# Altium PCB CAN Logger 3a HP3561 PCB.PcbDoc (part 2 of 2)
Units mil, origin at the board's own origin, x right, y up, seen from the top; angles counter-clockwise.
Board outline 2229 x 3254 mil, 4 copper layers (Component Side, Signal Layer 2, Signal Layer 1, Solder Side), stack 33.234 mil thick; 82 components, 94 nets, 403 pads, 304 vias.
Unrouted connection lines stored in the file: 3.
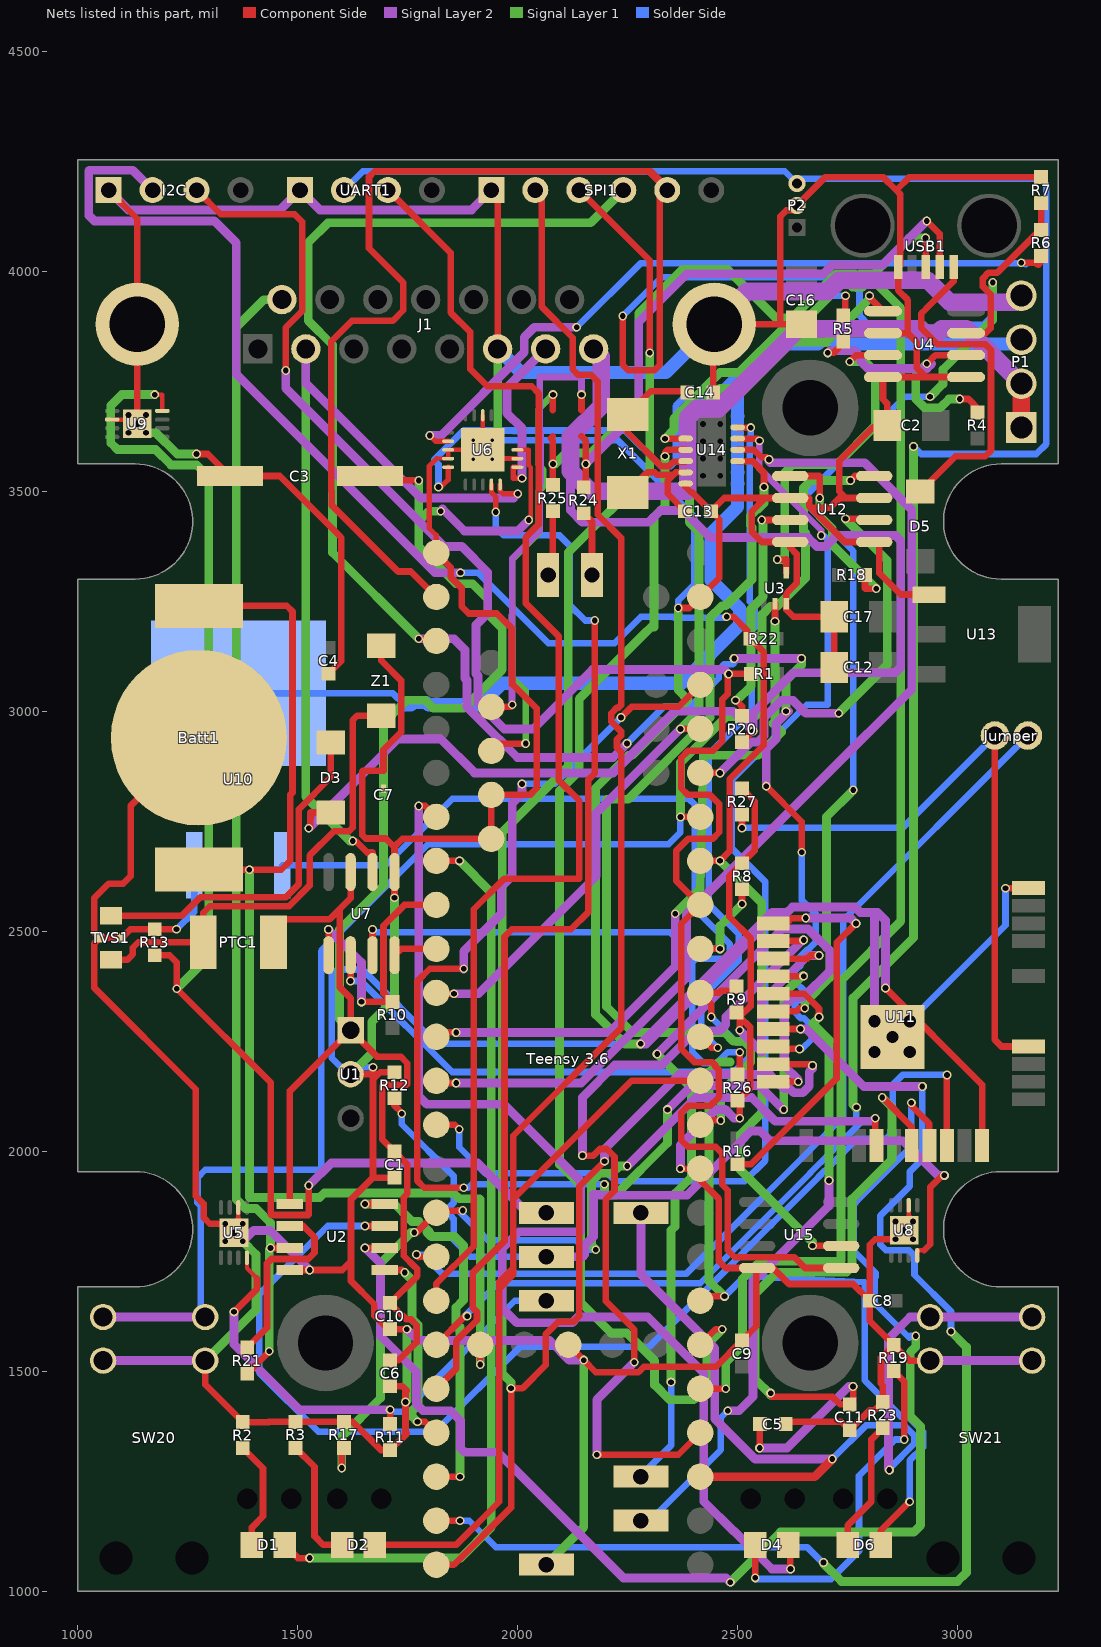
[diagram p4: the nets of this part, all layers, seen from the top]

## Via types
v1: diameter 20, hole 13, Component Side to Solder Side, 296 vias
v2: diameter 19.68, hole 7.87, Component Side to Solder Side, 4 vias
v3: diameter 50, hole 28, Component Side to Solder Side, 4 vias

## Nets (pads, with @x,y where several pads share a name; then routed paths per layer and width w, separated by ;. In a path a pad name is that pad's centre, name@x,y a point inside that pad or via, vN(x,y) a via of type N, cw(c..) or ccw(c..) an arc to the next point about the centre after c; other vN are vias at no path point) (continued)
GND: "Teensy 3.6.14" "Teensy 3.6.17" "Teensy 3.6.32" "Teensy 3.6.59" "Teensy 3.6.78" "Teensy 3.6.79" "Teensy 3.6.90" Batt1.2 C1.1 C2.1 C3.2 C4.2 C5.1 C6.1 C7.2 C8.1 C9.1 C10.2 C11.1 C12.1 C13.1 C14.1 C16.1 C17.1 I2C.1 J1.6 J1.16 J1.17 P1.4 P2.2 R2.2 R3.2 R7.2 R8.2 R9.2 R11.2 R12.2 R13.2 R17.2 R19.2 R23.2 R26.2 R27.1 SPI1.1 SW20.2 SW20.4 SW21.2 SW21.4 TVS1.3 U1.2 U2.8 U3.3 U4.2 U4.4 U4.5 U5.0 U5.2 U6.3 U6.4 U6.12 U6.18 U6.21 U7.5 U8.0 U8.2 U9.0 U9.2 U10.3 U11.9 U11.12 U11.28 U11.29 U12.2 U12.4 U12.5 U12.7 U13.1 U14.7 U15.4 UART1.1 USB1.4 Z1.1 | length 27041.5
  Component Side w10: U9.2@1077.91,3663.31 1115,3663.31 U9.0@1121.89,3663.31 ; U5.0@1364.84,1845.16 U5.2@1364.84,1872.09 ; 1816,3574.72 U6.4@1841.89,3574.72 U6.3@1841.89,3594.41 U6.21@1920.63,3594.41 U6.18@1920.63,3673.15 ; U8.0@2888.73,1850.16 U8.2@2888.73,1877.09
  Component Side w11.81: 1815,3360 1815,3400.44 1799.09,3416.34 1799.09,3557.82 1816,3574.72 ; U6.21@1944.25,3574.72 U6.12@1999.37,3574.72
  Component Side w14.76: U5.0@1364.84,1845.16 v1(1375,1835) ; U8.0@2888.73,1850.16 v1(2898.89,1840)
  Component Side w15: I2C.1@1070,4185 1135,4120 J1.16@1135,3880 U9.0@1135,3653.47 1144.53,3663 1155,3663 v1(1155,3673.47) ; v1(1115,3633.47) 1115,3663.31 v1(1115,3673.47) ; v1(1224.53,2504.53) R13.2@1175,2504.53 1119.53,2504.53 TVS1.3@1100,2485 TVS1.3@1050,2485 ; v1(1270,3585) 1295.55,3585 C3.2@1345.55,3535 1459,3535 1599,3395 1599,3114.47 C4.2@1570,3085.47 ; Batt1.2@1275,2940 1120,2785 1120,2625 1103,2608 1070,2608 1037,2575 1037,2498 TVS1.3@1050,2485 ; SW20.4@1289.5,1524 1289.5,1469.55 R2.2@1375,1384.05 1434,1384.05 1434.47,1384.53 R3.2@1495,1384.53 R17.2@1605,1384.53 1624.92,1384.53 1688.98,1320.47 R11.2@1710,1320.47 1748,1358.47 1745,1361.47 v1(1745,1430) 1745,1452.41 1748,1455.41 1737.94,1465.47 C6.1@1710,1465.47 ; v1(1335,1795) v1(1335,1835) 1300,1835 1286,1849 1286,1880 1268,1898 1268,2141 1037,2372 1037,2472 TVS1.3@1050,2485 ; U5.0@1355,1815 1365,1825 U5.0@1375,1825 ; v1(1375,1795) U5.0@1375,1825 ; v1(1375,1835) U5.0@1375,1825 ; U2.8@1482.13,1730 v1(1527,1730) 1601,1730 1621,1750 ; U1.2@1620,2175 1671,2175 ; v1(1671,2191) 1671,2175 ; Z1.1@1690,3149 1690,3115 1735,3070 1735,2952.5 1695,2912.5 1695,2865.12 1648,2865.12 1647,2864.12 1647,2718.28 1654.39,2710.89 1700,2710.89 1720,2690.88 ; C10.2@1710,1595.47 1747.53,1595.47 v1(1748,1595) 1705,1595 1674,1626 1674,1652 1621,1705 1621,1750 ; C1.1@1720,1940 1671.75,1940 ; R12.2@1720,2179.53 1687.5,2179.53 1682.97,2175 ; v1(1720,2576) U7.5@1720,2634.49 1720,2690.88 ; 1815,3360 1847.5,3327.5 1847.5,3305.68 1872.56,3280.62 1872.56,3238.7 1888.76,3222.5 1952.5,3222.5 1987,3188 1987,3061.25 1988.75,3061.25 2043,3007 2043,2825 2028,2810 1940,2810 1940,2710 1737.5,2710 1720,2692.5 1720,2690.88 ; U6.21@1920.63,3594.41 1931.22,3605 1942.28,3605 v2(1942.28,3616.06) ; SPI1.1@1940,4185 1954.49,4170.51 J1.6@1954.49,3824.09 ; v2(1942.28,3572.76) U6.21@1944.25,3574.72 ; 2115,1560 v1(2150,1525) 2177.5,1497.5 2274.32,1497.5 2286.82,1510 2450.47,1510 C9.1@2510,1569.53 2542.5,1602.03 2542.5,1732.5 U15.4@2544.53,1734.53 ; v1(2365,3235) 2390,3235 2415,3260 2458,3303 2458,3436.53 C13.1@2439.53,3455 ; v1(2369.84,1960) 2415,1960 2415,1933.5 2457.5,1891 2457.5,1750 2472.97,1734.53 U15.4@2544.53,1734.53 ; U14.7@2381.89,3517.64 2381,3517.64 2381,3510.5 2393.5,3498 2396.53,3498 C13.1@2439.53,3455 ; C14.1@2444.53,3725 2444.53,3801 2446.81,3803.29 J1.17@2446.81,3880 2545,3880 2545.12,3879.88 2598,3879.88 ; v1(2505,2075) 2505,2110 R26.2@2500,2115 2529,2144 2529,2281.47 R9.2@2505,2305.47 ; v1(2505,2275) R9.2@2505,2305.47 ; R27.1@2510,2824.53 2539,2795.53 2539,2683.53 R8.2@2510,2654.53 2481,2625.53 2481,2533 2529.47,2484.53 2529.47,2329.94 R9.2@2505,2305.47 ; U11.12@2581.04,2437.79 2657.79,2437.79 2665,2445 v1(2685,2445) ; C5.1@2609.53,1385 2735.47,1385 C11.1@2755,1365.47 2801,1411.47 2811.95,1411.47 R23.2@2830,1429.53 2830,1468 2826,1472 2826,1530.53 R19.2@2855,1559.53 ; C16.1@2645,3879.88 2598,3879.88 ; C12.1@2719.88,3100 C17.1@2719.88,3215 2627.09,3215 2610.59,3231.5 U3.3@2610.59,3244.57 2610.59,3268 2634,3291.41 2634,3357.82 2619.53,3372.29 U12.4@2619.53,3385 2555,3385 2532.5,3407.5 2532.5,3455 2562.5,3485 ; U12.7@2810.47,3485 2746,3485 ; U4.2@2830.51,3860 2886,3860 ; v1(2836,2370.84) 3055.84,2151 U11.28@3055.84,2012.91 ; v1(2858.89,1800) 2812.97,1800 2800.47,1787.5 C8.1@2800.47,1660 ; v1(2898.89,1800) v1(2898.89,1840) ; U13.1@2934.84,3265.55 2871,3265.55 2822,3314.55 2822,3385 U12.5@2810.47,3385 2744,3385 2666.5,3462.5 ; SW21.2@2937.5,1524 2890.53,1524 R19.2@2855,1559.53 ; U4.5@3019.49,3760 2928.18,3760 ; v1(3109,2598) U11.9@3160.96,2598.03 ; R7.2@3190,4214.53 2890.53,4214.53 2860.5,4184.5 ; 1621,1750 1621,1890 1671,1940 ; 1671,1940 1671.75,1940 ; 1671,1940 1671,2175 ; 1671,2175 1682.97,2175 ; 1671.75,1940 1671.75,2163.78 1682.97,2175 ; C13.1@2439.53,3455 2469.53,3485 2562.5,3485 ; U15.4@2544.53,1734.53 2580.47,1734.53 2617,1698 2762.47,1698 C8.1@2800.47,1660 ; 2562.5,3485 U12.2@2619.53,3485 2662,3485 2663,3484 2663,3466 2666.5,3462.5 ; 2598,3879.88 2597,3880.88 2597,4125 2611,4139 2635,4139 P2.2@2635,4150 2699.53,4214.53 2830.47,4214.53 2860.5,4184.5 ; 2666.5,3462.5 2709,3462.5 2731.5,3485 2746,3485 ; 2746,3485 2731,3500 2731,3569 2808,3646 2839.88,3646 C2.1@2839.88,3650 2839.88,3700 2830.51,3709.37 U4.4@2830.51,3760 2928.18,3760 ; C8.1@2800.47,1660 2800.47,1614.05 R19.2@2855,1559.53 ; 2860.5,4184.5 2870,4175 2870,4015 USB1.4@2865,4010 2865,3957 2887,3935 2887,3861 2886,3860 ; 2886,3860 2907.5,3838.5 2907.5,3780.68 2928.18,3760
  Signal Layer 2 w20: SW20.2@1057.5,1524 SW20.4@1289.5,1524 ; I2C.1@1070,4185 1115,4140 1460,4140 UART1.1@1505,4185 1550,4140 1895,4140 SPI1.1@1940,4185 ; v1(1375,1795) 1400,1820 1437,1820 v1(1527,1730) ; v1(1748,1595) 1773.47,1569.53 2072.47,1569.53 2117,1525 v1(2150,1525) ; v2(1898.98,3572.76) v2(1942.28,3572.76) ; v2(1898.98,3616.06) v2(1942.28,3616.06) ; v1(2369.84,1960) 2369.84,2013.67 2451.17,2095 2471.88,2095 2491.88,2075 v1(2505,2075) ; v1(2505,2275) 2554.29,2225.71 2554.29,2339.29 2660,2445 v1(2685,2445) ; 2589,2543 2578.5,2543 v1(2279.5,2244) 2292,2244 2591,2543 2612.64,2543 2624.64,2555 2767.15,2555 2779.15,2543 2811,2543 ; v3(2811,2225.47) 2817.61,2225.47 U11.29@2851.91,2259.76 ; v3(2811,2295.47) 2811,2543 ; v1(2836,2370.84) 2836,2525 2818,2543 2811,2543 ; v1(2858.89,1800) v1(2898.89,1800) ; U8.0@2878.89,1820 2868.89,1830 2858.89,1830 v1(2858.89,1840) v1(2898.89,1840) ; SW21.2@2937.5,1524 SW21.4@3169.5,1524
  Signal Layer 2 w40: J1.17@2446.81,3880 2521.3,3954.49 2704.99,3954.49 2730.5,3980 2932,3980 2982,3930 3130,3930 P1.4@3145,3945
  Signal Layer 1 w20: v1(1155,3673.47) v1(1155,3633.47) 1177.53,3633.47 1226,3585 v1(1270,3585) ; SW20.4@1289.5,1524 1405,1639.5 1405,1765 v1(1375,1795) ; U1.2@1620,2175 1668,2223 1668,2294 1720,2346 v1(1720,2576) ; v1(1745,1430) 1748,1433 v1(1748,1595) ; v2(1942.28,3572.76) v2(1942.28,3616.06) 1954.49,3628.27 J1.6@1954.49,3824.09 ; 2065,1060 2150,1145 v1(2150,1525) ; v1(2279.5,2244) 2244,2244 2177,2311 2177,2825 2252,2900 2260.36,2900 2387,3026.64 2365,3048.64 v1(2365,3235) ; v3(2811,2225.47) v3(2811,2295.47) ; v3(2891,2225.47) v3(2891,2295.47)
  Solder Side w15: v1(1115,3633.47) v1(1155,3633.47) ; v1(1224.53,2504.53) 1265,2545 U10.3@1265,2649.84 ; v1(1335,1795) v1(1375,1795) ; v1(1671,2191) 1598.5,2191 1577,2212.5 1577,2400 1590,2413 1647,2413 1816,2244 v1(2279.5,2244) ; v2(1898.98,3616.06) v2(1942.28,3616.06) 2227.94,3616.06 2401,3443 2401,3288 2365,3252 v1(2365,3235) ; v3(2811,2225.47) v3(2891,2225.47) ; v3(2891,2295.47) 3109,2513.47 v1(3109,2598)
  Solder Side w30: J1.6@1954.49,3824.09 2008.58,3770 2336.81,3770 J1.17@2446.81,3880
"GPS RX": "Teensy 3.6.41" P2.3 UART1.2 | length 5341.1
  Component Side w15: 1815,1560 1880,1625 v1(1885,1625)
  Signal Layer 1 w20: v1(2770,2100) 2770,2097.84 2762.16,2105.67 2762.16,2348 2900,2485.84 v1(2900,3602)
  Solder Side w15: UART1.2@1605,4185 1648,4228 2607,4228 P2.3@2635,4200 2635,4211 3187.5,4211 3202,4196.5 3202,3608 3179,3585 2917,3585 v1(2900,3602) ; v1(1885,1625) 1880,1625 1955,1700 2415,1700 2665,1950 2665,1951.1 2689.9,1976 2691,1976 2780,2065 2770,2075 v1(2770,2100)
"GPS TX": "Teensy 3.6.40" UART1.3 | length 3023
  Component Side w15: UART1.3@1705,4185 1847.5,4042.5 1847.5,3907 1892,3862.5 1892,3778 1931,3739 2032,3739 2047.5,3723.5 2047.5,3424.5 2018,3395 2018,3246 2093,3171 2093,2844 2140,2797 2140,2620 2139,2619 1969,2619 1899.97,2549.97 1899.97,1783.97 1815,1699 1815,1660
"J1708 RX": "Teensy 3.6.4" "Teensy 3.6.29" U4.1 | length 2243.6
  Component Side w15: 1815,2360 1817.21,2357.79 v1(1855,2357.79) ; v1(2370,2960) 2415,2960 ; v1(2800,3945) 2800,3940.51 U4.1@2830.51,3910
  Signal Layer 2 w20: v1(1855,2357.79) 1910.79,2357.79 2178,2625 2178,2768 v1(2370,2960)
  Signal Layer 1 w20: v1(2370,2960) 2412,3002 2412,3408.25 2390.25,3430 2390.25,3665.25 2459.65,3734.65 2506.3,3734.65 2611.65,3840 2702,3840 2800.51,3938.51 2800,3939.02 v1(2800,3945)
"J1708 TX": "Teensy 3.6.3" U3.2 | length 1614.3
  Component Side w15: 1815,2260 1825,2270 v1(1860,2270) ; v1(2585,3205) U3.2@2585,3244.57
  Signal Layer 2 w20: v1(1860,2270) 2208,2270 2358,2420 v1(2358,2540)
  Signal Layer 1 w20: v1(2358,2540) 2415,2597 2422,2900 2547,2900 2600,2953 2580.64,2972.36 2585,2976.72 v1(2585,3205)
J1708+: R5.2 U6.5 | length 1400.7
  Component Side w11.81: v1(1820,3510) 1825.47,3510 1825.97,3510.5 1841.89,3526.42 U6.5@1841.89,3555.04
  Component Side w15: R5.2@2740,3899.53 2745,3904.53 v1(2745,3945)
  Solder Side w15: v1(1820,3510) 1820,3561.41 1810,3571.41 1877,3638.41 2244.09,3638.41 2325,3557.5 2348,3557.5 2359,3568.5 2359,3694 2375,3710 2440,3710 2675,3945 v1(2745,3945)
J1708-: R6.2 U6.2 | length 1669
  Component Side w11.81: v1@1800,3624.91 v1(1800,3626.94) 1812.84,3614.09 U6.2@1841.89,3614.09
  Component Side w15: v1(3145,4020) 3178,4020 3183,4015 3190,4022 R6.2@3190,4035.47
  Signal Layer 2 w20: v1(1800,3626.94) 1825.59,3626.94 2015,3816.34 2015,3850.5 2037.5,3873 v1(2134,3873)
  Solder Side w15: v1(2134,3873) 2280,4019 v1@3152,4019 ; v1(3145,4020) 3151,4020 v1@3152,4019 ; v1@3152,4019 3158,4019 3155,4016 v1@3152,4019
LIN: J1.2 U6.10 U7.6 | length 1995.8
  Component Side w11.81: U6.10@1960,3515.67 1960,3501.5 1967.03,3494.47 v1(2000,3494.47)
  Component Side w15: v1(1625,2705) 1631.99,2705 1657.99,2679 1670,2679 U7.6@1670,2634.49
  Signal Layer 2 w20: J1.2@1518.27,3824.09 1518.27,3746.38 1779.64,3485 1990.53,3485 v1(2000,3494.47)
  Signal Layer 1 w20: J1.2@1518.27,3824.09 1518.27,2805.73 1619,2705 v1(1625,2705)
"LIN1 RX": "Teensy 3.6.6" R10.1 U7.1 | length 645
  Component Side w15: U7.1@1570,2445.51 v1(1570,2504) ; v1(1645,2339.53) R10.1@1715,2339.53 1695,2359.53 1695,2512.5 1742.5,2560 1815,2560
  Signal Layer 2 w20: v1(1570,2504) 1645,2429 v1(1645,2339.53)
"LIN1 TX": "Teensy 3.6.5" U7.4 | length 101
  Component Side w15: U7.4@1720,2445.51 1734.49,2460 1815,2460
"LIN !WAKE": "Teensy 3.6.24" R8.1 U7.3 | length 1112.9
  Component Side w15: U7.3@1670,2445.51 v1(1670,2504) ; v1(2510,2562) R8.1@2510,2595.47 ; 2415,2460 v1(2460,2460) 2415,2460
  Signal Layer 1 w20: v1(2460,2460) 2460,2512 v1(2510,2562)
  Solder Side w15: v1(1670,2504) 1676.5,2497.5 2347.68,2497.5 2385.18,2460 v1(2460,2460)
"LIN CS": "Teensy 3.6.23" R9.1 U7.2 | length 1359.2
  Component Side w15: v1(1620,2387) U7.2@1620,2445.51 ; v1(2440,2305) 2440,2335 2415,2360 2457,2360 2461.53,2364.53 R9.1@2505,2364.53
  Solder Side w15: v1(1620,2387) 1644,2387 1851,2180 2491.82,2180 2527.5,2215.68 2527.5,2234.32 2514.32,2247.5 2497.5,2247.5 v1(2440,2305)
"LIN Switch": "Teensy 3.6.42" U6.9 | length 2475.9
  Component Side w11.81: U6.9@1940.32,3515.67 1940.32,3497.41 1950,3487.73 v1(1950,3453)
  Component Side w15: 1815,1460 1860,1505 1860,1568.18 1907.5,1615.68 1907.5,1634.32 1897.5,1644.32 1897.5,1723 1970,1795.5 1970,2487.5 1987,2504.5 2121.5,2504.5 2160,2543 2160,2844 2175,2859 v1(2175,3206.53)
  Solder Side w15: v1(1950,3453) 1950,3418.28 1968.28,3400 2095,3400 2118.07,3376.93 2118.07,3241.92 2153.47,3206.53 v1(2175,3206.53)
NetBatt1_1: "Teensy 3.6.15" Batt1.1 | length 2703.2
  Component Side w15: Batt1.1@1275,2640 v1(1390,2640) 1462.5,2640 1482.5,2660 1482.5,2809.85 1488,2815.35 1488,3227 1475,3240 Batt1.1@1275,3240 ; v1(1915,1515) 1915,1560
  Signal Layer 1 w20: v1(1390,2640) 1390,1896 1391,1895 1550,1895 1560,1905 1854.12,1905 1867.12,1892 1913,1892 1915,1890 v1(1915,1515)
NetC5_2: C5.2 C11.2 U11.24 | length 1628.6
  Component Side w15: C5.2@2549.88,1385 2550,1384.88 v1(2550,1325.47) ; v1(2575,1450) 2575,1445 2578.5,1441.5 2716.03,1441.5 2733,1424.53 C11.2@2755,1424.53 2762.47,1432 v1(2762.47,1465) ; v1(2829,2122) 2895.84,2055.16 U11.24@2895.84,2012.91
  Signal Layer 2 w20: v1(2550,1325.47) 2612.97,1325.47 2752.5,1465 v1(2762.47,1465)
  Signal Layer 1 w20: v1(2575,1450) 2575,1446 2540,1481 2540,1675.5 2589.5,1725 2747.5,1725 2760,1737.5 2760,1891 2851,1982 2851,2100 v1(2829,2122)
NetC13_2: C13.2 U14.6 X1.1 | length 267.6
  Component Side w15: X1.1@2250,3497.83 2295.4,3543.23 2311.67,3543.23 2317.4,3537.5 2353.5,3537.5 2359.23,3543.23 ; C13.2@2380.47,3455 2341,3494.47 2341,3525 2359.23,3543.23 ; U14.6@2381.89,3543.23 2359.23,3543.23
NetC14_2: C14.2 U14.5 X1.2 | length 368
  Component Side w15: U14.5@2381.89,3568.82 2380.57,3567.5 2354.32,3567.5 2344.32,3557.5 2325.68,3557.5 2250,3633.18 X1.2@2250,3675 2302.5,3727.5 2382.97,3727.5 C14.2@2385.47,3725
NetD1_1: "Teensy 3.6.7" D1.1 | length 2108.8
  Component Side w15: D1.1@1470.4,1105 1500.4,1075 v1(1527,1075) ; 1815,2660 v1(1867.88,2660)
  Signal Layer 1 w20: v1(1527,1075) 1870,1075 1940,1145 1940,2587.88 v1(1867.88,2660)
NetD1_2: D1.2 R2.1 | length 249.6
  Component Side w15: R2.1@1375,1325 1421,1279 1421,1170 1395.6,1144.6 D1.2@1395.6,1105
NetD2_1: "Teensy 3.6.21" D2.1 SPI1.2 | length 4144
  Component Side w15: D2.1@1675.4,1105 1860,1105 1958,1203 1958,1687 ; SPI1.2@2040,4185 2055,4170 2055,3919.5 2125,3849.5 2125,3777.5 2137.5,3765 2167,3765 2182,3750 2182,3447 2235,3394 2235,3014.28 2229.22,3008.5 2225.68,3008.5 2212.5,2995.32 2212.5,2976.68 2235,2954.18 2235,2945.18 2225.82,2936 2225.82,2917.36 2235,2908.18 2235,2280 1990,2035 1990,1891 ; 2415,2160 2259,2160 1990,1891 ; 1958,1687 1958,1703 1990,1735 ; 1958,1687 1990,1719 1990,1735 ; 1990,1735 1990,1891
NetD2_2: D2.2 R3.1 | length 289.2
  Component Side w15: R3.1@1495,1325.47 1538,1282.47 1538,1125 1558,1105 D2.2@1600.6,1105
NetD3_2: D3.2 TVS1.1 | length 809.1
  Component Side w15: TVS1.1@1075,2535 1236,2535 1278,2577 1472,2577 1502.5,2607.5 1502.5,2777.5 1575,2850 D3.2@1575,2929
NetD4_1: "Teensy 3.6.8" D4.1 | length 2741.8
  Component Side w15: v1(1775,2785) 1790,2785 1815,2760 ; D4.1@2615.4,1105 2620,1100.4 v1(2620,1050)
  Signal Layer 2 w20: v1(1775,2785) 1775,2125 1793.27,2106.73 1968.27,2106.73 2143,1932 2143,1818 2142,1817 2003,1817 1965,1779 1965,1643 1998,1610 2123.71,1610 2136.71,1623 2295.71,1623 2423,1495.71 2423,1203.64 2489.83,1136.82 2491.18,1136.82 2578,1050 v1(2620,1050)
NetD4_2: D4.2 R19.1 | length 812.4
  Component Side w15: v1(2540.12,1030) 2540.12,1104.52 D4.2@2540.6,1105 ; R19.1@2855,1500.47 2878.89,1476.58 v1(2878.89,1344.47)
  Solder Side w15: v1(2540.12,1030) 2542.62,1027.5 2712.5,1027.5 2776,1091 2776,1262 2858.47,1344.47 v1(2878.89,1344.47)
NetD5_1: D5.1 USB1.1 | length 776.3
  Component Side w15: D5.1@2915,3500 2995,3580 3063,3580 3076,3593 3076,3821.5 3062.5,3835 2953.8,3835 2917.5,3871.3 2917.5,3904.32 2927.5,3914.32 2927.5,3914.5 2990.98,3977.98 USB1.1@2990.98,4010
NetD6_1: "Teensy 3.6.51" D6.1 R26.1 U10.1 | length 3536
  Component Side w15: 2415,1660 2425,1670 v1(2470,1670) ; R26.1@2500,2174.05 2505,2179.05 v1(2505,2225) ; D6.1@2825.4,1105 2825.4,1137.5 v1(2891,1203.1)
  Signal Layer 1 w20: v1(2470,1670) 2435,1705 2435,2180 2458.05,2203.05 2483.05,2203.05
  Solder Side w15: U10.1@1465,2649.84 1700,2649.84 ; 1700,2650 1851,2801 2389.5,2801 2403,2787.5 2403,2550 2482.5,2470.5 2482.5,2450.68 2469.32,2437.5 2405.68,2437.5 2397,2428.82 2397,2225.5 2422.5,2200 2452.18,2200 2477.18,2225 v1(2505,2225) ; v1(2470,1670) 2516,1716 2789,1702 2789,1479 2871.5,1396.5 2886.97,1396.5 2921.39,1362.08 2921.39,1326.87 2891,1296.48 v1(2891,1203.1)
NetD6_2: D6.2 R23.1 | length 298.4
  Component Side w15: D6.2@2750.6,1105 2750.6,1150 2804,1203.4 2804,1344.47 R23.1@2830,1370.47
NetI2C_2: "Teensy 3.6.26" I2C.2 R22.2 U15.6 | length 4073
  Component Side w15: 2415,2660 v1(2460,2660) 2481.75,2681.75 2481.75,2845.45 2559,2922.7 2559,3135.47 R22.2@2529.47,3165 2521.49,3172.99 2521.49,3183.99 2490.47,3215 v1(2475,3215) ; v1(2670,1785) 2735,1785 U15.6@2735.47,1784.53
  Signal Layer 2 w20: I2C.2@1170,4185 1125,4230 1026,4230 1025,4229 1025,4127.5 1037.5,4115 1310,4115 1360,4065 1360,3767 1812,3315 v1(1870,3315)
  Signal Layer 1 w20: v1(2460,2660) 2555,2565 2555,2087 2506,2038 2506,1957.53 2670,1793.53 v1(2670,1785)
  Solder Side w15: v1(1870,3315) 1910,3315 2070,3155 2220,3155 2280,3215 2353.18,3215 2355.68,3212.5 2472.5,3212.5 v1(2475,3215)
NetI2C_3: "Teensy 3.6.25" I2C.3 R1.2 U15.5 | length 4357.7
  Component Side w15: I2C.3@1270,4185 1325,4130 1492.5,4130 1510,4112.5 1510,3910 1472.5,3872.5 v1(1472.5,3775) ; R1.2@2530.47,3085 v1(2479.53,3085) 2477.5,3085 2477.5,3039.32 2465,3026.82 2465,2932 2443,2910 2387.5,2910 2372,2894.5 2372,2825 2387,2810 2437.5,2810 2458,2789.5 2458,2725 2443,2710 2387.5,2710 2360,2682.5 2360,2615 2415,2560 2372,2517 2372,2232.5 2402,2202.5 2442.5,2202.5 2448.5,2196.5 2448.5,2193.68 2457.5,2184.68 2457.5,2147 2458,2146.5 2458,2123.5 2437.5,2103 2387.5,2103 2372,2087.5 2372,2025 2387,2010 2450,2010 2465,1995 2465,1923.74 2477.5,1911.24 2477.5,1775 2493.5,1759 2629,1759 2653.47,1734.53 U15.5@2735.47,1734.53
  Signal Layer 2 w20: v1(1472.5,3775) 1472.5,3734.88 1832.38,3375 1872.5,3375 1931.94,3315.56 1931.94,3222.94 1905,3196 1905,3085.71 1910,3080.71 1910,3019.64 1970,2959.64 2034.64,2959.64 2170,3095 2469.53,3095 v1(2479.53,3085)
NetJumper_1: "Teensy 3.6.39" Jumper.1 | length 2226
  Component Side w15: v1(1770,1765) 1770,1763 1774,1759 1775,1760 1815,1760
  Solder Side w15: v1(1770,1765) 1785,1765 1829,1721 2382.82,1721 2740,2078.18 2740,2525 Jumper.1@3160,2945
NetJumper_2: Jumper.2 R27.2 U11.4 | length 1466.6
  Component Side w15: v1(2510,2735) R27.2@2510,2765.47 ; Jumper.2@3085,2945 3085,2253.03 3100,2238.03 U11.4@3160.96,2238.03
  Solder Side w15: v1(2510,2735) 2875,2735 Jumper.2@3085,2945
NetP1_3: P1.3 U10.2 | length 2513.4
  Solder Side w15: U10.2@1365,3041.57 1715.43,3041.57 1742,3015
  Solder Side w30: 1742,3015 1757.57,3015 1762.57,3020 1792.43,3020 1797.43,3015 1915.78,3015 1964.78,3064 2372.68,3064 2505,3196.32 2505,3233 2440,3298 2440,3405 2500,3465 2500,3594.17 2499.88,3594.29 2499.88,3635.71 2500,3635.83 2500,3724.36 2610.64,3835 2682.57,3835 2692.57,3845 2717.43,3845 2727.43,3835 3135,3835 P1.3@3145,3845
NetPTC1_1: PTC1.1 TVS1.2 Z1.2 | length 1075.9
  Component Side w15: TVS1.2@1075,2435 1112.5,2435 1125,2447.5 1125,2462.5 1137.5,2475 PTC1.1@1285,2475 1285,2542 1300,2557 1480.28,2557 1527,2603.72 1527,2672 1582.5,2727.5 1616.5,2727.5 1625,2736 1625,2980 1635,2990 Z1.2@1690,2990
NetR4_2: R4.2 R5.1 U4.6 | length 691.5
  Component Side w15: v1(2705,3815) 2718,3815 2740,3837 R5.1@2740,3840.47 ; v1(2930,3790) 2950,3810 U4.6@3019.49,3810 ; v1(3005,3710) 3024.53,3710 3050,3684.53 R4.2@3045,3679.53
  Signal Layer 2 w20: v1(2705,3815) 2710,3820 2765.36,3820 2780,3805.36 2780,3795.36 2796.07,3779.28 2930.46,3779.28 2941.18,3790 v1(2930,3790)
  Signal Layer 1 w20: v1(2930,3790) 2905,3765 2905,3710 2925,3690 2960.86,3690 2980.86,3710 v1(3005,3710)
NetR6_1: R6.1 R7.1 U4.7 | length 420
  Component Side w15: U4.7@3019.49,3860 3064,3860 3075.3,3871.3 3075.3,3947.89 3057.5,3965.68 3057.5,3984.32 3070.68,3997.5 3090.68,3997.5 3187.71,4094.53 R6.1@3190,4094.53 R7.1@3190,4155.47
NetR11_1: "Teensy 3.6.54" R11.1 U5.8 | length 1146.4
  Component Side w10: U5.8@1384.53,1757.91 1384.53,1734.11 1407.03,1711.61
  Component Side w15: v1(1355,1634.76) 1407.03,1686.79 1407.03,1711.61 ; R11.1@1710,1379.53 v1(1710,1412)
  Signal Layer 2 w20: v1(1355,1634.76) 1355,1561 1504,1412 v1(1710,1412)
  Solder Side w15: v1(1710,1412) 1714.5,1407.5 1754.32,1407.5 1767.5,1420.68 1767.5,1434.32 1993.18,1660 2065,1660
NetR12_1: "Teensy 3.6.53" R12.1 U8.8 | length 1968.2
  Component Side w10: U8.8@2908.42,1762.91 2908.42,1775 2924.5,1775
  Component Side w14.76: 2924.5,1775 2937,1787.5
  Component Side w15: R12.1@1720,2120.47 1720,2104 1736.38,2087.62 v1(1736.38,2085) ; 2937,1787.5 2937.5,1788 2937.5,1917.5 2965,1945 v1(2970,1945)
  Signal Layer 2 w20: 2065,1760 2147.5,1760 2152.5,1765 2152.5,1786.36 2172,1805.86 2172,1901.5 2185.14,1901.5 2186.64,1900 2385,1900 2515.6,2030.6 2515.6,2031.36 2530.24,2046 2550.95,2046 2573.43,2023.53 2876.47,2023.53 2955,1945 v1(2970,1945)
  Solder Side w15: v1(1736.38,2085) 1736.38,2061.12 1855,1942.5 1855,1926.35 ; 1854.97,1907.68 1854.97,1926.32 ; 1855,1907.65 1855,1883.28 1845,1873.28 1845,1856.72 1849.68,1852.04 1849.68,1850.68 1854.22,1846.14 1854.22,1837.5 1855,1836.72 1855,1797.5 1892.5,1760 2065,1760
NetR13_1: "Teensy 3.6.52" R13.1 U9.8 | length 3176.1
  Component Side w10: v1(1175,3720) 1191.7,3720 U9.8@1192.09,3682.99
  Component Side w15: R13.1@1175,2445.47 1208.53,2445.47 1225,2429 v1(1225,2369.5) 1439,2155.5 1439,1856 1440,1855 1524,1855 1525,1856 v1(1525,1922)
  Signal Layer 2 w20: v1(1525,1922) 1576,1973 1909,1973 2022,1860 2065,1860
  Signal Layer 1 w20: v1(1175,3720) 1100,3720 1075,3695 1075,3610 1075.36,3610 1090.36,3595 1176.96,3595 1211.96,3560 1270,3560 1297.66,3532.34 1297.66,2442.16 v1(1225,2369.5)
NetR16_1: R16.1 U11.10 | length 874.7
  Component Side w15: R16.1@2500,1970.47 2530.49,1970.47 2725,2164.98 2725,2473.79 v1(2769,2517.79) ; U11.10@2581.04,2517.79 2611.04,2517.79 2623.25,2530 v1(2655,2530)
  Signal Layer 2 w20: v1(2655,2530) 2756.79,2530 v1(2769,2517.79)
NetR17_1: "Teensy 3.6.38" R17.1 U11.22 | length 2119.3
  Component Side w15: v1(1600,1280) 1600,1320.47 R17.1@1605,1325.47 ; v1(1765,1815) 1770,1815 1815,1860 1820,1865 v1(1875,1865) ; v1(2812.97,2075) 2812.97,2035.85 2819.81,2029.02 U11.22@2815.84,2012.91
  Signal Layer 2 w20: v1(2249.18,1966.18) 2405,2122 2531.5,2122 2585.6,2067.9 2805.88,2067.9 v1(2812.97,2075)
  Signal Layer 1 w20: v1(1600,1280) 1600,1351 1688,1439 1688,1745.5 1757.5,1815 v1(1765,1815) ; v1(2177.5,1776) 2168,1785.5 2168,1931.36 2186.64,1950 2214.5,1950 2230.68,1966.18 v1(2249.18,1966.18)
  Solder Side w15: v1(1875,1865) 1865,1865 1932.5,1797.5 2132.68,1797.5 2154.18,1776 v1(2177.5,1776)
NetR18_2: R18.2 U12.1 | length 431.8
  Component Side w15: U12.1@2619.53,3535 2685.5,3535 2686.5,3534 v1(2686.5,3485) ; R18.2@2789.53,3310 2789.53,3279.47 2790,3279 v1(2815,3279)
  Signal Layer 1 w20: v1(2686.5,3485) 2686.5,3443.86 2715,3415.36 2715,3379 v1(2815,3279)
NetR20_2: R20.2 U12.3 | length 547
  Component Side w15: v1(2495,3025) 2496.75,3025 2510,3011.75 R20.2@2510,2989.05 ; v1(2555,3435) U12.3@2619.53,3435
  Signal Layer 1 w20: v1(2495,3025) 2498.25,3025 2530.64,3057.38 2530.64,3233.32 2558,3260.69 2558,3432 v1(2555,3435)
NetR21_1: R21.1 U2.6 | length 430
  Component Side w15: R21.1@1385,1553.53 1430,1598.53 1430,1745 1440,1755 1524,1755 1538,1769 1538,1804.5 1512.5,1830 U2.6@1482.13,1830
NetR24_2: R24.2 USB1.2 | length 1366
  Component Side w15: 2145,3625.47 2155,3615.47 v1(2155,3562.5) 2155,3524.53 2145,3514.53 R24.2@2150,3509.53 ; v1(2930,4115) 2959.49,4085.51 USB1.2@2959.49,4010
  Signal Layer 2 w20: v1(2155,3562.5) 2275,3682.5 2275,3885 2385,3995 2696.01,3995 2716.01,4015 2830,4015 v1(2930,4115)
NetR25_2: R25.2 USB1.3 | length 1465.6
  Component Side w15: R25.2@2080,3514.53 2075,3519.53 2080,3524.53 v1(2080,3562.5) 2080,3615.47 2075,3620.47 2080,3625.47 ; v1(2926.99,4076) 2927.99,4077.01 USB1.3@2927.99,4010
  Signal Layer 1 w15: v1(2080,3562.5) v1@2085,3562.5
  Signal Layer 1 w20: v1@2085,3562.5 2110,3587.5 2167.5,3587.5 2275,3695 2275,3905 2375,4005 2476.65,4005 2586.65,3895 2624.29,3895 2724.29,3995 2765.71,3995 2770.71,3990 2774.29,3990 2779.29,3995 2810,3995 2891,4076 v1(2926.99,4076)
NetSPI1_3: "Teensy 3.6.46" SPI1.3 U11.18 | length 4799.3
  Component Side w15: 1815,1060 1855,1060 1985,1190 v1(1985,1460.76) 2010.76,1460.76 2063.54,1513.54 2063.54,1583.54 2092,1612 2127,1612 2140,1625 2140,1919.53 v1(2197.47,1977) ; SPI1.3@2140,4185 2300,4025 v1(2300,3815) ; U11.18@2581.04,2197.79 2667.21,2197.79 v1(2670,2195)
  Signal Layer 2 w20: v1(2197.47,1977) 2197.47,2004.78 2367,2174.31 2573.73,2174.31 2606,2142.04 2618.19,2142.04 2627.44,2132.79 2648.15,2132.79 2662.79,2147.44 2662.79,2180.71 2670,2187.91 v1(2670,2195)
  Signal Layer 1 w20: v1(1985,1460.76) 1985,1474.29 1965,1494.29 1965,2725 2115,2875 2115,3361 2300,3546 v1(2300,3815)
NetSPI1_4: "Teensy 3.6.12" SPI1.4 U11.17 | length 4105
  Component Side w15: v1(1775,3165) 1820,3165 1815,3160 ; v1(2565,2830) 2645.94,2749.06 v1(2645.94,2679.47) ; U11.17@2581.04,2237.79 2586.33,2232.5 v1(2640.65,2232.5)
  Signal Layer 2 w20: v1(1775,3165) 1855,3165 1880,3140 1880,3075.36 1885,3070.36 1885,3009.29 1959.64,2934.64 1960,2934.64 1999.64,2895 2216.64,2895 v1(2248.32,2926.68) ; v1(2492,3120) v1(2645,3120) ; v1(2565,2830) 2565,2914.29 2587.32,2936.61 2587.32,2971.97 2615.36,3000 v1(2610,3000)
  Signal Layer 1 w20: v1(1775,3165) 1579,3361 1579,3833 1524,3888 1524,4066 1569,4111 2166,4111 SPI1.4@2240,4185 ; v1@2610,2999.85 v1(2610,3000) 2610,3069.73 2645,3104.73 v1(2645,3120)
  Solder Side w15: v1(2248.32,2926.68) 2331.64,3010 2391.81,3010 2457.03,3075.22 2457.03,3094.32 2470.21,3107.5 2489.31,3107.5 2492,3110.19 v1(2492,3120) ; v1(2640.65,2232.5) 2645.56,2232.5 2645.94,2232.12 2668.44,2254.62 2668.44,2284.32 2650.26,2302.5 2643.15,2302.5 2629.97,2315.68 2629.97,2334.32 2655.5,2359.85 2655.5,2360.71 2627.5,2388.71 2627.5,2407.35 2640.68,2420.53 2642.35,2420.53 2642.5,2420.68 2642.5,2442.68 2657.32,2457.5 2659.32,2457.5 2677.5,2475.68 2677.5,2539.32 2645.94,2570.88 v1(2645.94,2679.47)
NetSPI1_5: "Teensy 3.6.13" SPI1.5 U11.15 | length 5661.7
  Component Side w15: 1815,3260 1757,3318 1728,3318 1577,3469 1577,3500 1576,3501 1576,3841 1623,3888 1716.32,3888 1740,3911.68 1740,3974.64 1662,4052.64 1662,4215 1675,4228 2297,4228 ; v1(2239,3899) 2239,3787.5 2251.5,3775 2310.5,3775 2323,3787.5 SPI1.5@2323,4202 ; SPI1.5@2340,4185 SPI1.5@2323,4202 ; U11.15@2581.04,2317.79 2632.79,2317.79 2640,2325 v1(2652.47,2325) ; 2297,4228 SPI1.5@2323,4202 ; 2297,4228 2303,4228 2323,4208 SPI1.5@2323,4202
  Signal Layer 1 w20: v1(2652.47,2325) 2652.47,2337.47 2710,2395 2710,2455.36 2702,2463.36 2702,2760 v1(2763,2821) ; v1(2937.5,3715) 2967,3744.5 2967,3777 3080,3890 v1(3080,3975)
  Solder Side w15: v1(2239,3899) 2327,3987 2745,3987 2777,3955 2777,3900 2798,3879 2924.18,3879 2930.68,3872.5 2949.32,3872.5 2951.82,3875 2954.28,3875 2958.28,3879 3059,3879 3080,3900 v1(3080,3975) ; v1(2763,2821) 2762.5,2821.5 2762.5,3164.32 2763,3164.82 2763,3364.29 2656.52,3470.77 2656.52,3491.52 2880,3715 v1(2937.5,3715)
NetSW20_1: "Teensy 3.6.27" SW20.1 SW20.3 U12.8 | length 3436.5
  Component Side w15: v1(2370,2760) 2415,2760 ; v1(2756.5,3525) 2766.5,3535 U12.8@2810.47,3535
  Signal Layer 2 w20: SW20.1@1057.5,1623 SW20.3@1289.5,1623
  Signal Layer 1 w20: v1(2370,2760) 2370,2883.49 2474.51,2988 2539,2988 2555.64,3004.64 2555.64,3219.99 2574.64,3239 2590.32,3239 2654,3302.68 2654,3405.64 2650,3409.64 2650,3508.5 2666.5,3525 v1(2756.5,3525)
  Solder Side w15: SW20.3@1289.5,1623 1279,1633.5 1279,1876 1272,1883 1272,1940.5 1289.5,1958 1552,1958 1553,1959 1553,2455 1796,2698 2343,2698 2370,2725 v1(2370,2760)
NetSW21_1: "Teensy 3.6.62" "Teensy 3.6.68" SW21.1 SW21.3 | length 2135.5
  Component Side w20: 2415,1260 2675,1260 v1(2715,1300)
  Signal Layer 2 w20: 2280,1860 2280,1720 2448,1552 2448,1392 2540,1300 v1(2715,1300) ; v1(2845,1275) 2843,1277 2843,1574 2892,1623 SW21.1@2937.5,1623 SW21.3@3169.5,1623
  Solder Side w15: v1(2715,1300) 2791.5,1376.5 2878.68,1376.5 2901.39,1353.79 2901.39,1335.15 2845,1278.76 v1(2845,1275)
"NetTeensy 3.6_1": "Teensy 3.6.1" U14.12 | length 2750.7
  Component Side w15: 1815,2060 1857,2060 v1(1867,2050) ; U14.12@2500,3620 2545,3620 2550,3615 v1(2549.88,3615)
  Signal Layer 2 w15: v1(2549.88,3615) 2548.82,3613.94 2548.82,3553 2690,3411.82 v1(2690,3400)
  Solder Side w15: v1(1867,2050) 1867,2009 1926,1950 2203.82,1950 2221.82,1932 2516,1932 2563.1,1979.1 2563.1,2611.9 2487,2688 2487,2845 2657,3015 2705,3015 2705,3390 2695,3400 v1(2690,3400)
"NetTeensy 3.6_2": "Teensy 3.6.2" U14.11 | length 2401
  Component Side w15: 1815,2160 1820,2155 v1(1860,2155) ; U14.11@2500,3594.41 2536.85,3594.41 2553.67,3577.58 2566.49,3577.58 v1(2571.32,3572.76)
  Signal Layer 2 w20: v1(1860,2155) 2144.69,2155 2383.59,2393.91 2383.59,2537.5 2796.09,2950 2796.36,2950 2896,3049.64 2896,3458.02 2789.02,3565 2575,3565 2571.32,3568.68 v1(2571.32,3572.76)
"NetTeensy 3.6_20": "Teensy 3.6.20" U14.10 | length 2081.9
  Component Side w15: 2415,2060 2416,2059 2427,2070 v1(2461.53,2070) ; U14.10@2500,3568.82 2534.15,3568.82 2560,3542.97 v1(2560,3510)
  Signal Layer 1 w20: v1(2461.53,2070) 2461.53,2133.53 2530,2202 2530,2235.36 2515.36,2250 2490,2250 2470,2270 2261,2270 2202,2329 2202,2799 2203,2800 2251.15,2800 2437,2985.85 2437,3212.36 2464.64,3240 2473,3240 2533,3300 2533,3418.04 2530,3421.04 2530,3445.36 2544.64,3460 2547,3460 2560,3473 v1(2560,3510)
"NetTeensy 3.6_22": "Teensy 3.6.22" U14.13 | length 1619.1
  Component Side w15: 2415,2260 2440,2235 v1(2455,2235) ; U14.13@2500,3645.59 2500.59,3645 v1(2530,3645)
  Solder Side w15: v1(2455,2235) 2417,2273 2417,2348 2502.5,2433.5 2502.5,2493.5 2434.03,2561.97 2434.03,2902.03 2532.5,3000.5 2532.5,3184.93 2538.5,3190.93 2538.5,3238.39 2527.5,3249.39 2527.5,3605.56 2527.38,3605.68 2527.38,3624.32 2530,3626.94 v1(2530,3645)
"NetTeensy 3.6_28": "Teensy 3.6.28" U12.6 | length 1013.1
  Component Side w15: 2415,2860 v1(2460,2860) ; v1(2745,3438) 2807.47,3438 U12.6@2810.47,3435
  Signal Layer 2 w20: v1(2460,2860) 2530,2930 2545.36,2930 2560,2944.64 2560,2985.36 2599.64,3025 2625.71,3025 2655,2995.71 v1(2729.79,2995.71)
  Signal Layer 1 w20: v1(2729.79,2995.71) 2840,3105.92 2840,3343 v1(2745,3438)
"NetTeensy 3.6_30": "Teensy 3.6.30" U11.13 | length 2977.3
  Component Side w15: v1(1877.47,1917) 1787.5,1917 1772,1932.5 1772,2387 1800,2415 v1(1877.47,2415) ; v1(2235,2986) 2259,3010 2365,3010 2415,3060 ; U11.13@2581.04,2397.79 2649.76,2397.79 v1(2650,2398.03)
  Signal Layer 2 w20: v1@1876.45,2413.98 v1(1877.47,2415) 1877.47,2454.38 1962.5,2539.41 1962.5,2601.57 1987.5,2626.57 1987.5,2791.21 2010,2813.71 v1(2010,2835) ; v1(2340.5,2094.5) 2395.31,2149.31 2548.73,2149.31 2603.04,2095 v1(2605,2095)
  Signal Layer 1 w20: v1(2197,1925) 2197,1900 2222,1900 2340.5,2018.5 v1(2340.5,2094.5) ; v1(2605,2095) 2605,2357.29 2645.74,2398.03 v1(2650,2398.03)
  Solder Side w15: v1(1877.47,1917) 1888,1917 1896,1925 v1(2197,1925) ; v1(2010,2835) 2084,2835 v1(2235,2986)
"NetTeensy 3.6_45": "Teensy 3.6.45" U11.16 | length 2921.6
  Component Side w15: 1815,1160 v1(1868.76,1160) ; U11.16@2581.04,2277.79 v1(2643.15,2277.79)
  Signal Layer 2 w20: v1(2643.15,2277.79) 2655.71,2277.79 2786.5,2147 v1(2920,2147)
  Signal Layer 1 w20: v1(2695,1065) 2695,1063 2736,1022 3000,1022 3020,1042 3020,1555 v1(2985,1590)
  Solder Side w15: v1(1868.76,1160) 1890,1160 1950,1100 2658,1100 2693,1065 v1(2695,1065) ; v1(2920,2147) 2920,1982 2891,1953 2891,1920 2824.5,1853.5 2824.5,1787.5 2837,1775 2889.5,1775 2902,1762.5 2902,1719 2901.6,1719 2985,1635.6 v1(2985,1590)
"NetTeensy 3.6_49": "Teensy 3.6.49" U14.3 | length 3556.5
  Component Side w15: v1(2335,3620) U14.3@2381.89,3620 ; 2415,1460 v1(2473,1460)
  Signal Layer 1 w20: v1(2335,3620) 2355,3640 2355,3665.36 2460.15,3770.51 2503.51,3770.51 2603,3870 2634.65,3870 2734.65,3970 2755.36,3970 2760.36,3965 2784.64,3965 2789.64,3970 2818,3970 2871,3917 2871,2523 2735,2387 2735,1750 2551,1750 2511,1710 2511,1558 2473,1520 v1(2473,1460)
"NetTeensy 3.6_50": "Teensy 3.6.50" U14.4 | length 2740.6
  Component Side w15: v1(2335,3580) 2335,3588.7 2340.71,3594.41 U14.4@2381.89,3594.41 ; 2415,1560 2450,1595 v1(2465,1595)
  Signal Layer 1 w20: v1(2335,3580) 2335,3466.86 2310,3441.86 2310,3191 2306.5,3194.5 2295,3183 2294.64,3183 2140,3028.36 2140,2864.64 2095,2819.64 2095,1970 2143,1922 2143,1656 2212,1587 2248,1587 2311.3,1523.7 2311.3,1468.7 2345,1435 2400,1435 2430,1465 2430,1560 v1(2465,1595)
"NetTeensy 3.6_63": "Teensy 3.6.63" U11.11 | length 1952.8
  Component Side w15: v1(2147.5,1990) 2172,1990 2187,2005 2202.5,2005 2220,1987.5 2220,1910 2200,1890 2200,1659.5 2265,1594.5 v1(2265,1520) ; v1(2180,1310) 2365,1310 2415,1360 ; U11.11@2581.04,2477.79 2647.79,2477.79 v1(2650,2480)
  Signal Layer 2 w20: v1(2147.5,1990) 2147.5,2122.46 2221.04,2196 2327.36,2196 2405.36,2274 2459.5,2274 2473,2287.5 2473,2305 2648,2480 v1(2650,2480) ; v1(2180,1310) 2180,1435 v1(2265,1520)
"NetTeensy 3.6_72": "Teensy 3.6.72" U11.19 | length 1995.8
  Component Side w15: U11.19@2581.04,2157.79 v1(2637.79,2157.79)
  Signal Layer 2 w20: v1(2317,2221) 2601,2505 2660.36,2505 2710,2455.36 2710,2410.5 2649.5,2350 2626.56,2350 2606.44,2329.88 2606.44,2193.56 2637.79,2162.21 v1(2637.79,2157.79)
  Signal Layer 1 w20: v1(2317,2221) 2395,2143 2395,1941.29 2357.5,1903.79 2357.5,1828.79 2348.71,1820 v1(2348.71,1475)
  Solder Side w15: 2280,1260 2280,1262.4 2348.71,1331.12 v1(2348.71,1475)
"NetTeensy 3.6_74": "Teensy 3.6.74" U11.14 | length 1509.2
  Component Side w15: U11.14@2581.04,2357.79 2651.49,2357.79 2685,2324.29 v1(2685,2305)
  Signal Layer 2 w20: v1(2477.5,1410) 2503,1410 2535,1442 2535,1703 2707.5,1875.5 v1(2707.5,1933.5)
  Signal Layer 1 w20: v1(2685,2305) 2685,2304 2671,2290 2710,2251 2707.5,2248.5 v1(2707.5,1933.5)
  Solder Side w15: 2280,1160 2300.68,1160 2461.53,1320.85 2461.53,1394.03 v1(2477.5,1410)
"NetTeensy 3.6_76": "Teensy 3.6.76" | length 1000.3
  Component Side w15: 1940,3010 1954,2996 1968,3010 v1@1985,3010 ; 2145,3684.53 v1(2145,3720)
  Signal Layer 2 w15: v1(1987.5,3015) 1987.14,3015.36 1987.14,3216.89 1987.5,3217.24 1987.5,3347.5 2050,3410 2050,3518.18 2052.5,3520.68 2052.5,3632.79 2050,3635.29 2050,3760 2145,3760 v1(2145,3720)
"NetTeensy 3.6_77": "Teensy 3.6.77" | length 973.2
  Component Side w15: 1940,2910 1956.68,2926.68 v1(2018,2926.68) ; 2080,3684.53 v1(2080,3720)
  Signal Layer 1 w15: v1(2018,2926.68) 2018,3046 1987.5,3076.5 1987.5,3197.89 1987.14,3198.25 1987.14,3216.89 1987.5,3217.24 1987.5,3345 2047.5,3405 2047.5,3500.32 2057.5,3510.32 2057.5,3549.68 2047.5,3559.68 2047.5,3687.5 v1(2080,3720)
NetU2_2: U2.2 U11.25 | length 3074.4
  Component Side w15: v1(1653,1780) U2.2@1697.87,1780 ; v1(2895,2110) 2895,2103.5 2935.84,2062.66 U11.25@2935.84,2012.91
  Signal Layer 2 w20: v1(1653,1780) 1688,1745 1688,1580 1770,1498 1770,1425 1785,1410 1847.23,1410 1870,1387.23 1870,1325 1879.64,1315.36 1954.64,1315.36 2240,1030 2473.5,1030 v1(2483.5,1020)
  Signal Layer 1 w20: v1(2483.5,1020) 2597.5,1134 2900,1134 2916,1150 2916,1374 2890,1400 2892.5,1402.5 2892.5,1542.64 2905,1555.14 v1(2905,1580)
  Solder Side w15: v1(2895,2110) 2895,2015 2897,2013 2764,1880 2764,1773 2814.41,1722.59 2814.41,1714.84 2811.7,1712.12 2811.7,1654.31 2890,1576 2894,1580 v1(2905,1580)
NetU2_3: U2.3 U11.26 | length 2707.1
  Component Side w15: v1(1653,1830) U2.3@1697.87,1830 ; U11.26@2975.84,2012.91 v1(2975.84,2173.47)
  Solder Side w15: v1(1653,1830) 1568,1830 1412,1674 1412,1497 1546.5,1362.5 1812.5,1362.5 2005,1555 2298.29,1555 2685,1941.71 2685,1942.82 2698.18,1956 2699.29,1956 2771.79,2028.5 2837.5,2028.5 2853,2044 2853,2151.47 2875,2173.47 v1(2975.84,2173.47)
NetU3_4: U3.4 U4.3 | length 791
  Component Side w15: v1(2590,3345) 2610,3345 2610.59,3345.59 U3.4@2610.59,3315.43 ; v1(2755,3795) 2770,3810 U4.3@2830.51,3810
  Signal Layer 1 w20: v1(2590,3345) 2605,3345 2607,3343 2607,3543.04 2625,3561.04 2725.04,3561.04 2812.97,3648.97 2812.97,3772.03 2790,3795 v1(2755,3795)
RAW: D3.1 J1.8 P1.1 P1.2 R20.1 | length 4709.9
  Component Side w15: v1(1525,2734) 1527.99,2736.99 1529,2770 D3.1@1575,2770 ; R20.1@2510,2930 v1(2535,2955)
  Component Side w40: P1.1@3145,3645 P1.2@3145,3745
  Signal Layer 2 w20: v1(1525,2734) 1728,2937 1825,2937 1902,2860 2217,2860 2357,3000 2490,3000 v1(2535,2955) 2535,2995.71 2626.79,3087.5 2858.5,3087.5 2871,3100 2871,3387.5 2858.5,3400 2725.36,3400 2700.36,3375 2679.64,3375 2659.64,3395 2438.24,3395 2376.74,3456.5 2324.64,3456.5 2298.14,3430 2147,3430 2120,3457 2120,3545.5 ; J1.8@2172.6,3824.09 J1.8@2190,3806.69
  Signal Layer 2 w40: J1.8@2190,3806.69 2190,3694 2120,3624 2120,3545.5 2165.5,3500 2386.26,3500 2386.26,3667.96 2406.76,3688.47 2457.12,3688.47 2638.66,3870 2915.5,3870 2925.5,3860 2954.5,3860 2964.5,3870 3020,3870 P1.2@3145,3745
"Safe 12V": C1.2 C3.1 C6.2 C10.1 PTC1.2 U1.1 U2.5 U6.13 U7.7 | length 4269
  Component Side w10: U6.13@1999.37,3594.41 2025,3594.41 2025,3559.25 2030,3554.25 2030,3440 v1(2025,3435)
  Component Side w15: PTC1.2@1445,2475 1445,2527 1572,2527 1595,2550 ; U2.5@1482.13,1880 1482,1880 1482,2137 U1.1@1620,2275 ; U7.7@1620,2634.49 1620,2575 1595,2550 ; C3.1@1664.45,3535 1674.45,3525 v1(1775,3525) ; C6.2@1710,1524.53 1728.73,1524.53 1770.5,1566.3 1770.5,1604.32 1757.32,1617.5 1747.03,1617.5 C10.1@1710,1654.53 1772,1716.53 1772,1731.5 1767,1736.5 1766.68,1736.5 1741,1762.18 1741,1895 1749,1903 1749,1970.05 C1.2@1720,1999.05 1691.75,2027.3 1691.75,2148 1694.75,2151 1748,2151 1749,2152 1749,2200 1734,2215 1680,2215 U1.1@1620,2275 ; 1595,2550 1595,2373 1620,2348 U1.1@1620,2275
  Signal Layer 2 w20: v1(1825,3455) 1825,3456 1829,3460 1879,3410 2000,3410 v1(2025,3435)
  Signal Layer 1 w20: U1.1@1620,2275 1595,2300 1595,2504 1695,2604 1695,2972.5 1747.5,3025 1790.36,3025 1808.31,3007.04 1877.4,3007.04 1965,3094.64 1965,3188.57 1931.94,3221.63 1931.94,3255.36 1897.3,3290 1859.64,3290 1775,3374.64 v1(1775,3525) ; 1783,3440 1798,3455 v1(1825,3455)
SHLD/LIN: J1.7 U6.11 | length 401.8
  Component Side w11.81: U6.11@1999.37,3555.04 1990,3555.04 1990,3530 1992.88,3532.88 1995.76,3530 v1(2010,3530)
  Signal Layer 2 w20: v1(2010,3530) 2010,3643.47 1975.37,3678.1 1975.37,3735.92 J1.7@2063.54,3824.09
SWCAN: J1.9 R21.2 U2.7 | length 2621.1
  Component Side w15: R21.2@1385,1494.47 1435,1544.47 v1(1435,1545) ; v1(1438,1780) U2.7@1482.13,1780
  Signal Layer 1 w20: v1(1435,1545) 1435,1777 v1(1438,1780) 1438,1837 1405,1870 1380.5,1870 1360,1890.5 1360,3873 1422.91,3935.91 J1.9@1463.74,3935.91
SWCANRX: "Teensy 3.6.44" U2.4 | length 915.7
  Component Side w15: v1(1653,1880) U2.4@1697.87,1880 ; 1815,1260 v1(1868.76,1260)
  Signal Layer 1 w20: v1(1653,1880) 1720,1880 1753.57,1846.43 1760,1840 1775.36,1840 1799.71,1815.64 1793.5,1815.64 1803.29,1805.86 1856.95,1805.86 1876.45,1786.36 1876.45,1661.1 1860,1644.64 1860,1600.36 1859.64,1600 1868.76,1600 v1(1868.76,1260)
SWCANTX: "Teensy 3.6.43" U2.1 | length 462.7
  Component Side w15: U2.1@1697.87,1730 1737,1730 v1(1743,1724) ; v1(1772,1385) 1790,1385 1815,1360
  Signal Layer 1 w20: v1(1743,1724) 1760,1707 1760,1618.36 1773,1605.36 1773,1422.64 1760,1409.64 1760,1397 v1(1772,1385)
"USB D_N": "Teensy 3.6.82" R24.1 | length 148.3
  Component Side w15: R24.1@2150,3450.47 2169,3431.47 2169,3310
"USB D_P": "Teensy 3.6.83" R25.1 | length 150
  Component Side w15: 2069,3310 2080,3321 R25.1@2080,3455.47
pads on no net: "Teensy 3.6.16" "Teensy 3.6.18" "Teensy 3.6.19" "Teensy 3.6.31" "Teensy 3.6.35" "Teensy 3.6.36" "Teensy 3.6.37" "Teensy 3.6.61" "Teensy 3.6.88" "Teensy 3.6.91" L1. L2. L3. L4. SW20. SW21. U3.1 U6.14 U6.15 U6.16 U6.17 U7.8 U11.1 U11.2 U11.3 U11.5 U11.6 U11.7 U11.8 U11.21 U11.27 U14. U14.8 U14.9 U15.1 U15.2 U15.3 U15.7 USB1.0 USB1.5

## Keep-outs
Keep-Out Layer:
  the board outline again, w10

## Other copper
Component Side:
  rectangle net 3V3: 3010,2989.05 3225,3300
Solder Side:
  rectangle net 3V3: 2800,3295 2960,3565
  rectangle net 3V3: 2836,2990 3225,3300.5
  rectangle: 2410,3500.68 2473,3685
  rectangle net NetP1_3: 1135,1980 1535,2265
  rectangle net NetP1_3: 1015,1980 1185,2765
  rectangle net NetP1_3: 1295,3170 1760,3730
  rectangle net NetP1_3: 1010,2750 1760,3290

## Silkscreen, mask and mechanical layers (free items; w line width, h text height)
Mechanical 1:
  text "Dots are anodes" at 1304.25,850 h40

## Dimensions
2665,1564 to 3229,1000 on Mechanical 1
1000,1000 to 3229,1000 on Mechanical 1
1000,1000 to 1000,4254 on Mechanical 1

## Text inside footprints (layer, text, board x,y; h text height)
C3: Top Overlay "+" at 1755.55,3575 h60
J1: Top Overlay "1" at 1375,3870 h30; Top Overlay "8" at 2165,3870 h30; Top Overlay "15" at 2095,3985 h30; Top Overlay "9" at 1475,3985 h30
U1: Top Overlay "GND" at 1518.27,2125 h40 r90; Top Overlay "Vout" at 1585,1995 h20; Top Overlay "TAB" at 1090,2117 h40 r90; Top Overlay "Vin" at 1585,2325 h20